# Altium PCB PCB1.PcbDoc
Units mil, origin at the board's own origin, x right, y up, seen from the top; angles counter-clockwise.
Board outline 2380 x 3440 mil, 2 copper layers (Top Layer, Bottom Layer); 14 components, 43 nets, 141 pads, 58 vias.
Unrouted connection lines stored in the file: 2.
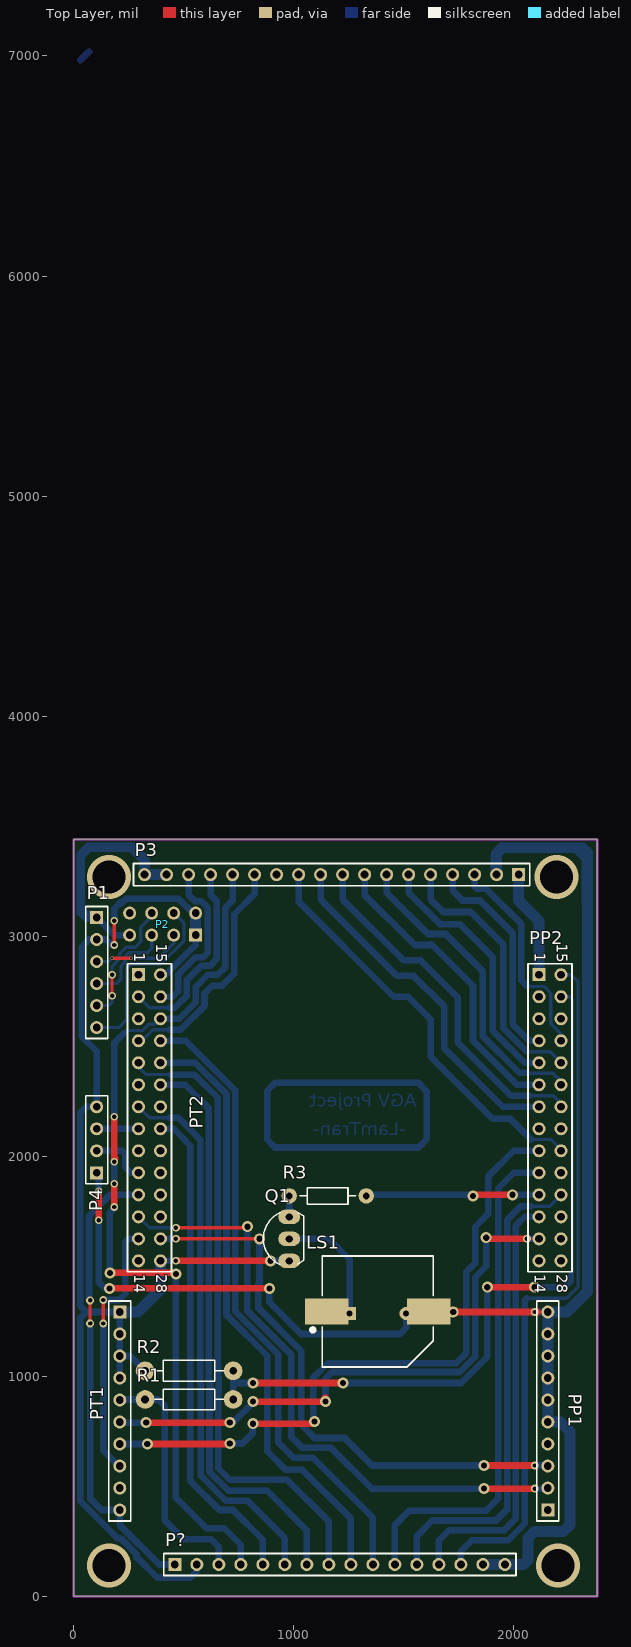
[diagram p0: Top Layer view]
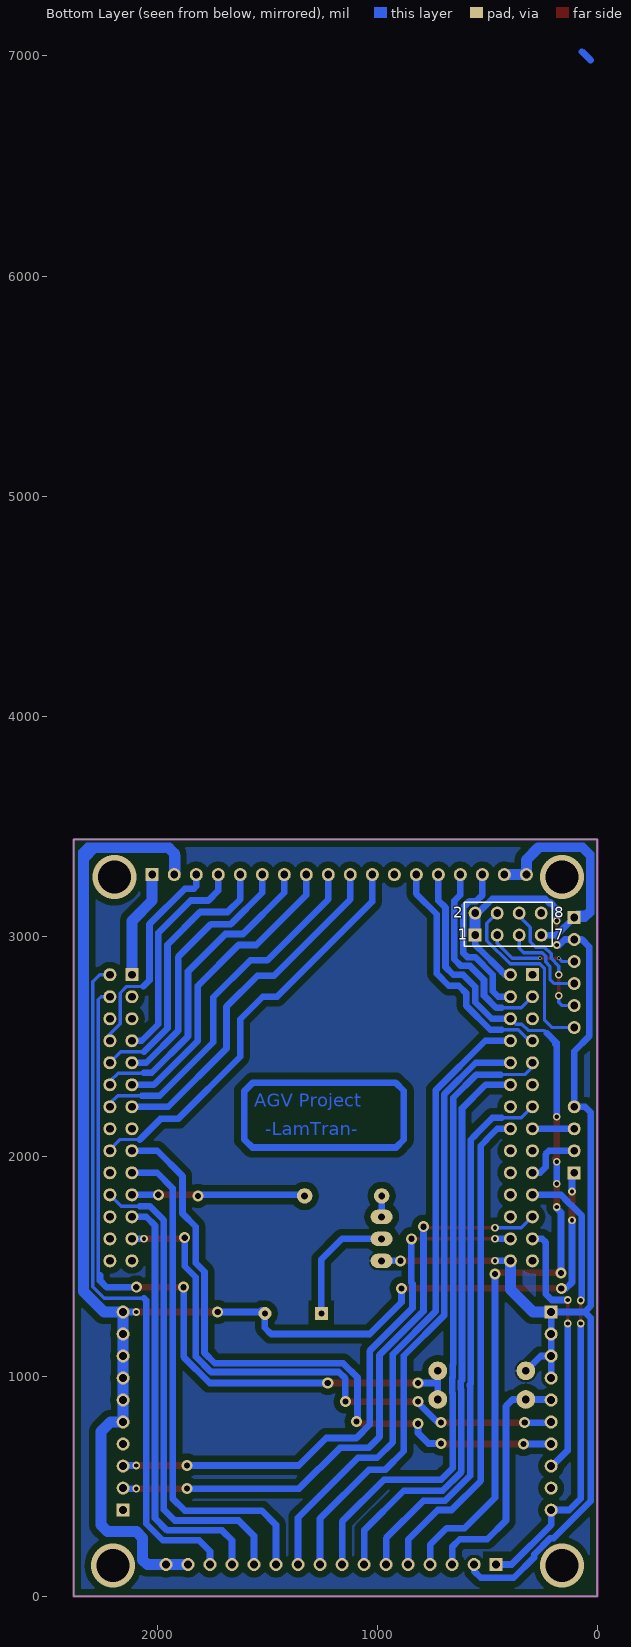
[diagram p1: Bottom Layer view, seen from below]

## Layer stack, top to bottom
Top Solder: solder mask 0.4, Solder Resist, Dk 3.5
Top Layer: signal copper 1.4
Dielectric 1: dielectric 12.6, FR-4, Dk 4.8
Bottom Layer: signal copper 1.4
Bottom Solder: solder mask 0.4, Solder Resist, Dk 3.5

## Board outline
0,0 0,3440 2380,3440 2380,0

## Design rules (kind name [scope] priority, off if disabled: settings)
Clearance [All] p1: gap=30 ignorepadtopadclearanceinfootprint=FALSE
PolygonConnect [All] p1: connectstyle=Relief reliefconductorwidth=10 reliefentries=4 polygonreliefangle="90 Angle" airgapwidth=10
RoutingVias [All] p1: holewidth=15 width=20 viastyle="Through Hole" minholewidth=10 minwidth=15 maxholewidth=20 maxwidth=30
SolderMaskExpansion [All] p1: expansion=4
UnRoutedNet [All] p1: checkbadconnections=TRUE
Width [All] p1: maxlimit=50 minlimit=15 preferedwidth=30
29 further rules are at their usual default settings.

## Components (designator, comment, footprint, x,y, rotation, side; value= is the part's Value field where it differs from the comment)
LS1 "Buzzer" ABSM-1574 1150,1295 r0 top
P1 "Header 6" HDR1X6 105,3085 r270 top
P2 "Header 4X2" HDR2X4 555,3005 r180 top
P3 "Header 18" HDR1X18 2022.5,3280 r180 top
P4 "Header 4" HDR1X4 105,1925 r90 top
P? "Header 16" HDR1X16 460,145 r0 top
PP1 "Header 10" HDR1X10 2155,392.5 r90 top
PP2 "Header 14X2A" HDR2X14_CEN 2115,2825 r270 top
PT1 "Header 10" HDR1X10 210,1292.5 r270 top
PT2 "Header 14X2A" HDR2X14_CEN 295,2825 r270 top
Q1 "C1815" QTO-92 980,1625 r90 top
R1 "10k" RES-1/4W 510,900 r180 top
R2 "10k" RES-1/4W 510,1030 r180 top
R3 "1k" R1/4W 1330,1820 r180 top value="R1/4W - 1K"

## Footprints (in the part's own frame and the unit in brackets; to place one, negate y for a bottom-side part, rotate by r counter-clockwise, add the part's x,y. Pads: shape width x height; smd on the part's side, far side on the other; paste and mask are expansions set on the pad)
ABSM-1574 [mm] "Magnetic Transducer Buzzer"
  rect 5x3 smd: 1(0,0) 2(11.8,0)
  rect 1.5x1.5 hole 0.7: 1A(2.65,-0.24)
  round 1.5 hole 0.7: 2A(9.15,-0.24)
  silkscreen extent -1.83,-6.4 12.3,6.4
HDR1X4 [mm] "Connector; Header; 4 Position"
  rect 1.5x1.5 hole 0.9: 1(0,0)
  round 1.5 hole 0.9: 2(2.54,0) 3(5.08,0) 4(7.62,0)
  silkscreen extent -1.27,-1.27 8.89,1.27
HDR1X6 [mm] "Connector; Header; 6 Position"
  rect 1.5x1.5 hole 0.9: 1(0,0)
  round 1.5 hole 0.9: 2(2.54,0) 3(5.08,0) 4(7.62,0) 5(10.16,0) 6(12.7,0)
  silkscreen extent -1.27,-1.27 13.97,1.27
HDR1X10 [mm] "Connector; Header; 10 Position"
  rect 1.5x1.5 hole 0.9: 1(0,0)
  round 1.5 hole 0.9: 2(2.54,0) 3(5.08,0) 4(7.62,0) 5(10.16,0) 6(12.7,0) 7(15.24,0) 8(17.78,0) 9(20.32,0) 10(22.86,0)
  silkscreen extent -1.27,-1.27 24.13,1.27
HDR1X16 [mm] "Connector; Header; 16 Position"
  rect 1.5x1.5 hole 0.9: 1(0,0)
  round 1.5 hole 0.9: 2(2.54,0) 3(5.08,0) 4(7.62,0) 5(10.16,0) 6(12.7,0) 7(15.24,0) 8(17.78,0) 9(20.32,0) 10(22.86,0) 11(25.4,0) 12(27.94,0) 13(30.48,0) 14(33.02,0) 15(35.56,0) 16(38.1,0)
  silkscreen extent -1.27,-1.27 39.37,1.27
HDR1X18 [mm] "Connector; Header; 18 Position"
  rect 1.5x1.5 hole 0.9: 1(0,0)
  round 1.5 hole 0.9: 2(2.54,0) 3(5.08,0) 4(7.62,0) 5(10.16,0) 6(12.7,0) 7(15.24,0) 8(17.78,0) 9(20.32,0) 10(22.86,0) 11(25.4,0) 12(27.94,0) 13(30.48,0) 14(33.02,0) 15(35.56,0) 16(38.1,0) 17(40.64,0) 18(43.18,0)
  silkscreen extent -1.27,-1.27 44.45,1.27
HDR2X4 [mm] "Connector; Header; 4x2 Position"
  rect 1.5x1.5 hole 0.9: 1(0,0)
  round 1.5 hole 0.9: 2(0,-2.54) 3(2.54,0) 4(2.54,-2.54) 5(5.08,0) 6(5.08,-2.54) 7(7.62,0) 8(7.62,-2.54)
HDR2X14_CEN [mm] "Connector; Header; 14x2 Position"
  rect 1.5x1.5 hole 0.9: 1(0,0)
  round 1.5 hole 0.9: 2(2.54,0) 3(5.08,0) 4(7.62,0) 5(10.16,0) 6(12.7,0) 7(15.24,0) 8(17.78,0) 9(20.32,0) 10(22.86,0) 11(25.4,0) 12(27.94,0) 13(30.48,0) 14(33.02,0) 15(0,2.54) 16(2.54,2.54) 17(5.08,2.54) 18(7.62,2.54) 19(10.16,2.54) 20(12.7,2.54) 21(15.24,2.54) 22(17.78,2.54) 23(20.32,2.54) 24(22.86,2.54) 25(25.4,2.54) 26(27.94,2.54) 27(30.48,2.54) 28(33.02,2.54)
  silkscreen extent -1.27,-1.27 34.29,3.81
QTO-92 [mil] "TO-92"
  oval 66x100 hole 32: 1(-100,0) 2(0,0) 3(100,0)
  silkscreen extent -117,-65 120,118, body extent -109,-66 109,95, height 245
R1/4W [mil] "R 1/4W, 2 Pin, 350mil"
  round 70 hole 31: 1(0,0) 2(350,0)
  silkscreen extent 48,-38 302,38, body extent -40,-47 386,47, height 111
RES-1/4W [mil]
  round 85 hole 35: 1(-215,5) 2(185,5)
  silkscreen extent -173,-42 141,52, body extent -227,-42 197,52, height 95

## Part data
LS1: "Magnetic Transducer Buzzer", ComponentLink1Description="Manufacturer Link", ComponentLink1URL=http://www.megastar.com/linecard/buzzmode/index.php, DatasheetVersion=17-Dec-2003, LatestRevisionDate=17-Dec-2003, LatestRevisionNote="Schematic revised, PCB Footprint replaced.", PackageDescription="Magnetic Transducer Buzzer", PackageReference=ABSM-1574, Published=24-Mar-1999, Publisher="Altium Limited"
P1: "Header, 6-Pin", LatestRevisionDate=17-Jul-2002, LatestRevisionNote="Re-released for DXP Platform.", Publisher="Altium Limited"
P2: "Header, 4-Pin, Dual row", LatestRevisionDate=17-Jul-2002, LatestRevisionNote="Re-released for DXP Platform.", Publisher="Altium Limited"
P3: "Header, 18-Pin", LatestRevisionDate=17-Jul-2002, LatestRevisionNote="Re-released for DXP Platform.", Publisher="Altium Limited"
P4: "Header, 4-Pin", LatestRevisionDate=17-Jul-2002, LatestRevisionNote="Re-released for DXP Platform.", Publisher="Altium Limited"
P?: "Header, 16-Pin", LatestRevisionDate=17-Jul-2002, LatestRevisionNote="Re-released for DXP Platform.", Publisher="Altium Limited"
PP1 PT1: "Header, 10-Pin", LatestRevisionDate=17-Jul-2002, LatestRevisionNote="Re-released for DXP Platform.", Publisher="Altium Limited"
PP2 PT2: "Header, 14-Pin, Dual row", LatestRevisionDate=17-Jul-2002, LatestRevisionNote="Re-released for DXP Platform.", Publisher="Altium Limited"
Q1: "NPN 600mW, ECB", =C2383
R1 R2: library part Res, "Res", Manufacturer="Generic Components", Class=Passive, Published=08/06/2000, Publisher="Altium Hobart Technology Centre", SubClass=R
R3: library part R1/4W, "Resistor 1/4W"

## Via types
v1: diameter 50, hole 28, Top Layer to Bottom Layer, 25 vias
v2: diameter 35, hole 20, Top Layer to Bottom Layer, 21 vias
v3: diameter 15, hole 10, Top Layer to Bottom Layer, 8 vias
v4: diameter 200, hole 150, Top Layer to Bottom Layer, 4 vias

## Nets (pads, with @x,y where several pads share a name; then routed paths per layer and width w, separated by ;. In a path a pad name is that pad's centre, name@x,y a point inside that pad or via, vN(x,y) a via of type N, cw(c..) or ccw(c..) an arc to the next point about the centre after c; other vN are vias at no path point)
GND: P1.2 P2.1 P2.2 P3.1 P4.4 P?.2 PP2.1 PT1.1 PT1.2 PT1.3 PT1.4 PT2.15 PT2.28 Q1.1 R2.2 | length 6507.9
  Top Layer w15: v2(185,2960) v2(185,3070)
  Top Layer w30: v2(465,1525) v1@885,1525
  Bottom Layer w15: v2(185,3070) v2@185,3075
  Bottom Layer w30: v2(185,2960) 173.43,2960 148.43,2985 P1.2 70,2985 37.5,2952.5 37.5,2545 105,2477.5 P4.4 56,2225 30,2199 30,1320 57.5,1292.5 ; v2@185,3075 185,3125 215,3155 ; PT1.4 PT1.3 ; 218.89,3151.11 237.58,3169.81 477.69,3169.81 542.5,3105 P2.2 ; R2.2 257.5,1092.5 PT1.3 ; PT2.28 v2(465,1525) ; PT2.15@395,2836.57 PT2.15 420,2825 435,2840 435,2841.57 538.43,2945 540,2945 555,2960 P2.1 ; P?.2 560,115 530,85 380,85 286,179 286,191.78 212.78,265 198.43,265 30,433.43 30,1265 57.5,1292.5 ; v1@885,1525 v1(895,1525) Q1.1 ; 57.5,1292.5 PT1.1 PT1.2 PT1.3
  Bottom Layer w50: PT1.1 292.5,1292.5 395,1395 PT2.28 ; P2.1 P2.2 ; P3.1 2022.5,3162.5 2115,3070 PP2.1
NetLS1_1: LS1.1 LS1.1A Q1.2 | length 559.4
  Bottom Layer w30: Q1.2 1160,1625 1255,1530 LS1.1A@1255,1285
NetLS1_2: LS1.2 LS1.2A P3.2 P4.1 P?.15 P?.16 PP1.5 PP1.6 PP1.7 PP1.8 PP1.9 PP1.10 | length 7059
  Top Layer w30: v3(115,1710) v3(115,1840) ; v1(163.75,1400) v1(890,1400) ; v1(1725,1292.5) 1727.5,1292.5 1735,1300 1742.5,1292.5 v2@2110,1292.5
  Bottom Layer w30: P4.1 115,1915 v3(115,1840) ; v3(115,1710) 115,1426.57 141.57,1400 v1(163.75,1400) ; v1(890,1400) 890,1336.57 1034.07,1192.5 1482.5,1192.5 1510.91,1220.91 1510.91,1285 1525.91,1300 1533.41,1292.5 v1(1725,1292.5) ; 1947.5,3400 2265,3400 2270,3405 2335,3340 2335,3140 ; v2@2110,1292.5 PP1.10
  Bottom Layer w50: P?.15 P?.16 2045,145 2066,166 2066,266 2095,295 2225,295 2255,325 2255,750 2212.5,792.5 PP1.5 PP1.6 PP1.7 PP1.8 PP1.9 PP1.10 2242.5,1292.5 2335,1385 2335,3140 ; P3.2 1922.5,3375 1947.5,3400
  other v2: 2095,1292.5 115,1710 115,1840
NetP1_1: P1.1 P2.7 P3.17 P3.18 PT2.1 | length 1008.9
  Bottom Layer w30: P2.7 185,3005 P1.1 55,3085 36,3104 36,3361 75,3400 270,3400
  Bottom Layer w50: 270,3400 322.5,3347.5 P3.18 P3.17
NetP1_3: P1.3 P2.3 | length 420.9
  Top Layer w15: v3(175,2900) v3(260.84,2900)
  Bottom Layer w15: P1.3 159.64,2885 174.64,2900 v3(175,2900) ; v3(260.84,2900) 386.21,2900 455,2968.79 P2.3
NetP1_4: P1.4 P2.5 | length 425.8
  Bottom Layer w15: P1.4 195,2785 215.13,2805.13 215.13,2864.29 235,2884.16 235,2909.51 250.49,2925 335,2925 355,2945 P2.5
NetP1_5: P1.5 P2.6 | length 585.3
  Top Layer w15: v2(175,2730) 167.5,2737.5 175,2745 v2(175,2825)
  Bottom Layer w15: P1.5 160,2685 175,2700 v2(175,2730) ; v2(175,2825) 175,2864.64 210,2899.64 210,2919.87 240.13,2950 280,2950 305,2975 305,3040 355,3090 P2.6
NetP1_6: P1.6 P2.4 | length 841.8
  Bottom Layer w15: P1.6 205,2585 240.13,2620.13 240.13,2853.93 261.2,2875 396.57,2875 502.03,2980.46 502.03,3057.97 P2.4
NetP3_3: P3.3 PP2.18 | length 984.9
  Bottom Layer w15: 2062.97,2772.03 2137.97,2772.03 2167.97,2742.03 2167.97,2602.03 2215,2555 PP2.18
  Bottom Layer w30: P3.3 1822.5,3227.5 1835,3215 1875,3215 2035,3055 2035,2800 2062.97,2772.03
NetP3_4: P3.4 PP2.4 | length 990.8
  Bottom Layer w30: P3.4 1722.5,3207.5 1767.5,3162.5 1847.5,3162.5 1995,3015 1995,2600 2070,2525 PP2.4
NetP3_5: P3.5 PP2.19 | length 1235.2
  Bottom Layer w15: 2060,2475 2165,2475 PP2.19
  Bottom Layer w30: P3.5 1622.5,3167.5 1680,3110 1805,3110 1953.33,2961.67 1953.33,2581.67 2060,2475
NetP3_6: P3.6 PP2.5 | length 1191.2
  Bottom Layer w30: P3.6 1522.5,3197.5 1665,3055 1755,3055 1905,2905 1905,2570 2050,2425 PP2.5
NetP3_7: P3.7 PP2.20 | length 1418
  Bottom Layer w15: 2060,2380 2062.03,2377.97 2177.03,2377.97 2215,2340 PP2.20
  Bottom Layer w30: P3.7 1422.5,3197.5 1610,3010 1690,3010 1860,2840 1860,2545 2025,2380 2060,2380
NetP3_8: P3.8 PP2.6 | length 1388.7
  Bottom Layer w30: P3.8 1322.5,3187.5 1550,2960 1630,2960 1815,2775 1815,2525 2015,2325 PP2.6
NetP3_9: P3.9 PP2.21 | length 1623.8
  Bottom Layer w15: 2070,2275 2180,2275 2215,2240 PP2.21
  Bottom Layer w30: P3.9 1222.5,3167.5 1500,2890 1577.5,2890 1745,2722.5 1745,2518.33 1988.33,2275 2070,2275
NetP3_10: P3.10 PP2.7 | length 1606.7
  Bottom Layer w30: P3.10 1122.5,3167.5 1470,2820 1545,2820 1685,2680 1685,2490 1950,2225 PP2.7
NetP3_11: P3.11 PP2.23 | length 1886.6
  Bottom Layer w15: 2078.56,2076.44 2168.56,2076.44 2215,2030 PP2.23
  Bottom Layer w30: P3.11 1022.5,3157.5 1455,2725 1520,2725 1622.5,2622.5 1622.5,2452.5 1905,2170 1985,2170 2078.56,2076.44
NetP3_13: P3.13 PT2.4 | length 1082.8
  Bottom Layer w15: PT2.4 310,2525 360,2575 435,2575
  Bottom Layer w30: 435,2575 486.57,2575 595,2683.43 595,2740 630,2775 675,2775 730,2830 730,3100 822.5,3192.5 P3.13
NetP3_14: P3.14 P?.4 PT2.17 | length 3975.8
  Top Layer w30: v1(165,1470) 460,1470 v1(465,1465) ; v3(185,1769.5) v3(185,1875) ; v2(185,1975) 185,1985 190,1990 185,1995 v2(185,2180)
  Bottom Layer w15: 230,2560 242.03,2572.03 314.48,2572.03 342.45,2600 370,2600 PT2.17
  Bottom Layer w30: v1(165,1470) 165,1744 185,1764 v3(185,1769.5) ; v3(185,1875) v2(185,1975) ; v2(185,2180) 185,2505 190,2510 185,2515 230,2560 ; PT2.17 480,2625 555,2700 555,2770 610,2825 655,2825 690,2860 690,3130 722.5,3162.5 P3.14 ; v1(465,1465) 465,448.72 603.72,310 685,310 760,235 P?.4
  other v2: 185,1769.5 185,1875
NetP3_15: P3.15 PT2.2 | length 905.2
  Bottom Layer w15: PT2.2 345,2675 435,2675
  Bottom Layer w30: 435,2675 460,2675 515,2730 515,2801.57 578.43,2865 620,2865 650,2895 650,3160 622.5,3187.5 P3.15
NetP3_16: P3.16 PT2.16 | length 750.6
  Bottom Layer w30: PT2.16 450,2725 475,2750 475,2825 555,2905 590,2905 610,2925 610,3130 580.47,3159.53 550.47,3159.53 522.5,3187.5 P3.16
NetP4_2: P4.2 PT2.10 | length 266.6
  Bottom Layer w30: P4.2 220,2025 235,2010 235,1950 260,1925 PT2.10
NetP4_3: P4.3 PT2.8 | length 190
  Bottom Layer w30: P4.3 PT2.8
NetP?_1: P?.1 PT1.10 PT2.11 | length 2102.5
  Top Layer w15: v2(75,1240) v2(75,1345)
  Bottom Layer w30: v2(75,1240) 75,445 127.5,392.5 PT1.10 210,325 209.34,325 389.34,145 P?.1 ; v2(75,1345) 70,1350 70,1730 120,1780 121.57,1780 145,1803.43 145,1805 165,1825 PT2.11
  other v3: 80,1245 80,1345
NetP?_3: P?.3 PT1.5 R1.2 | length 1113.2
  Bottom Layer w30: PT1.5 212.5,895 R1.2 385,895 415,865 415,345 500,260 625,260 660,225 P?.3
NetP?_5: P?.5 PT2.22 | length 2244.4
  Bottom Layer w30: PT2.22 455,2125 505,2075 505,2073.14 530,2048.14 530,525 662.5,392.5 725,392.5 860,257.5 P?.5
NetP?_6: P?.6 PT2.7 | length 2492.3
  Bottom Layer w15: PT2.7 345,2175 435,2175
  Bottom Layer w30: 435,2175 476.86,2175 555.81,2096.05 555.81,2094.19 575,2075 575,966.4 580,961.4 580,958.6 577.5,956.1 577.5,549.36 691.86,435 790,435 960,265 P?.6
NetP?_7: P?.7 PT2.20 | length 2626.9
  Bottom Layer w30: PT2.20 507.5,2325 615,2217.5 615,982.97 620,977.97 620,942.03 617.5,939.53 617.5,565.93 703.43,480 880,480 1060,300 P?.7
NetP?_8: P?.8 PT2.5 | length 2922
  Bottom Layer w15: PT2.5 295,2405 327.97,2372.03 427.97,2372.03 430,2370 440,2370
  Bottom Layer w30: 440,2370 550.81,2370 655,2265.81 655,1055.46 657.5,1052.96 657.5,997.04 660,994.54 660,925.46 657.5,922.96 657.5,582.5 710,530 970,530 1160,340 P?.8
NetP?_9: P?.9 PT2.19 | length 2773.7
  Bottom Layer w30: PT2.19 552.38,2425 695,2282.38 695,1278.43 880,1093.43 880,660 965,575 1038.72,575 1260,353.72 P?.9
NetP?_10: P?.10 PT2.18 | length 2897.7
  Bottom Layer w30: PT2.18 508.95,2525 735,2298.95 735,1295 930,1100 930,700 1000,630 1087.5,630 1360,357.5 P?.10
NetP?_11: P?.11 PP2.10 | length 2323.7
  Bottom Layer w30: P?.11 1460,325 1525,390 1875,390 1930,445 1930,1855 2000,1925 PP2.10
NetP?_12: P?.12 PP2.25 | length 2197.3
  Bottom Layer w15: 2078.56,1773.56 2163.56,1773.56 PP2.25
  Bottom Layer w30: P?.12 1560,275 1630,345 1920,345 1970,395 1970,1710 2033.56,1773.56 2078.56,1773.56
NetP?_13: P?.13 PP2.12 | length 1953
  Bottom Layer w30: P?.13 1660,255 1705,300 1955,300 2010,355 2010,1685 2050,1725 PP2.12
NetP?_14: P?.14 PP2.15 | length 3161.1
  Bottom Layer w15: 2060,1355 2240,1355 2292.5,1407.5 2292.5,2792.5 2260,2825 PP2.15
  Bottom Layer w30: P?.14 1760,205 1810,255 1975,255 2050,330 2050,1345 2060,1355
NetPP1_2: PP1.2 PT2.12 | length 2806.1
  Top Layer w15: v2(465,1675) v1@780,1675
  Top Layer w30: v1(1865,490) v2(2095,490)
  Bottom Layer w15: PT2.12 345,1675 v2(465,1675)
  Bottom Layer w30: v1@780,1675 790,1665 790,1296.57 990,1096.57 990,725 1040,675 1170,675 1355,490 v1(1865,490) ; v2(2095,490) 2152.5,490 PP1.2
  other v1: 790,1680
NetPP1_3: PP1.3 PT2.27 | length 2590.3
  Top Layer w15: v2@454.19,1625 v1(845,1625)
  Top Layer w30: v1(1865,595) v2(2095,595) ; PP1.3@2147.5,600 PP1.3
  Bottom Layer w30: PT2.27 v2@454.19,1625 ; v1(845,1625) 845,1425.71 840,1420.71 840,1310 1035,1115 1035,780 1095,720 1231.57,720 1356.57,595 v1(1865,595) ; v2(2095,595) 2142.5,595 2147.5,590 2152.5,595 PP1.3
  other v2: 465,1625
NetPP2_9: PP2.9 PT1.7 | length 3018.1
  Top Layer w30: v1(335,692.5) 707.5,692.5 v1(710,695) ; v1(815,785) 1085,785 v1(1095,795)
  Bottom Layer w30: PT1.7 v1(335,692.5) ; v1(710,695) 767.5,695 815,742.5 v1(815,785) ; v1(1095,795) 1090,800 1090,995 1155,1060 1738.43,1060 1785,1106.57 1785,1475 1825,1515 1825,1680 1885,1740 1885,1910 2000,2025 PP2.9
NetPP2_11: PP2.11 R3.1 | length 789.1
  Top Layer w30: v1@1810,1825 v1(1995,1825)
  Bottom Layer w30: R3.1@1330,1835 1340,1825 v1@1810,1825 ; v1(1995,1825) PP2.11
  other v1: 1815,1820
NetPP2_13: PP2.13 PT1.6 | length 2634.2
  Top Layer w30: v1(330,790) v1(710,790) ; v1(815,885) 1126.57,885 1145,903.43 v1(1145,885) ; v1(1875,1630) 1880,1625 v2@2065,1625
  Bottom Layer w30: PT1.6 212.5,790 v1(330,790) ; v1(710,790) 725,790 v1@820,885 ; v1(815,885) v1@820,885 ; v1@822.5,887.5 v1@820,885 ; v1(1145,885) 1145,990 1175,1020 1755,1020 1825,1090 1825,1450 1875,1500 v1(1875,1630) ; v2@2075,1625 PP2.13
  other v2: 2060,1625
NetPP2_16: PP2.16 R1.1 R2.1 | length 3368.2
  Top Layer w30: v1(815,970) v1(1225,970) ; v1(1880,1405) v1@2085,1405
  Bottom Layer w15: PP2.16 2255,2725 2267.5,2712.5 2267.5,1460
  Bottom Layer w30: R1.1 725,970 ; R2.1 725,970 ; v1(815,970) 725,970 ; v1(1225,970) 1761.57,970 1880,1088.43 v1(1880,1405) ; v1(2095,1405) 2230,1405 2260,1435 2260,1460
NetPT1_8: PT1.8 PT2.13 | length 1200.9
  Top Layer w15: v2(135,1240) v2(135,1347.03)
  Bottom Layer w30: v2(135,1240) 135,663.14 205.64,592.5 PT1.8 ; v2(135,1347.03) 207.03,1347.03 235,1375 235,1610 250,1625 PT2.13
NetQ1_3: Q1.3 R3.2 | length 110
  Bottom Layer w30: Q1.3 R3.2@980,1835
pads on no net: P2.8 P3.12 PP1.1 PP1.4 PP2.2 PP2.3 PP2.8 PP2.14 PP2.17 PP2.22 PP2.24 PP2.26 PP2.27 PP2.28 PT1.9 PT2.3 PT2.6 PT2.9 PT2.14 PT2.21 PT2.23 PT2.24 PT2.25 PT2.26
copper on no net: | length 2007.3
  Bottom Layer w30: 31,6981 70,7020 ; 880,2075 880,2297.5 917.5,2335 1565,2335 1605,2295 1605,2160.01 1605,2077.5 1567.5,2040 915,2040 880,2075
  other v4: 161,140 2201,140 161,3270 2195,3270

## Polygon pours and split planes (outlines as drawn)
GND on Bottom Layer (solid, pour order 33): 2380,3440 0,3440 0,0 2380,0
no net on Bottom Layer "Bottom Layer-No Net" (solid, pour order 31): 0,7060
no net on Bottom Layer "Bottom Layer-No Net" (solid, pour order 0): 5,3440

## Keep-outs
Keep-Out Layer:
  the board outline again, w10

## Other copper
Bottom Layer:
  region: 450,3380
  region net NetP1_1: 265,3425 60,3425 15,3380 15,3100 50,3065 95,3065 95,3115 60,3115 50,3125 50,3365 70,3385 265,3385
  region net NetLS1_2: 1953.33,3425 1950,3425 1895,3370 1895,3285 1935,3285 1940,3290 1940,3402.5 1965.83,3402.5 1978.33,3415
  region net NetLS1_2: 1938.61,3425 2322.78,3425 2358.89,3388.89 2358.89,3140 2315,3140 2310,3145 2310,3352.78 2282.78,3380 1963.61,3380
  region net NetLS1_2: 1922.5,3357.5
  text "AGV Project" at 1560,2225 h60
  text "-LamTran-" at 1510,2095 h60

## Text inside footprints (layer, text, board x,y; h text height)
P2: Bottom Overlay "2" at 655,3085 h50; Bottom Overlay "1" at 635,2985 h50; Bottom Overlay "7" at 195,2985 h50; Bottom Overlay "8" at 195,3085 h50
PP2: Top Overlay "28" at 2195,1465 h50 r270; Top Overlay "14" at 2095,1465 h50 r270; Top Overlay "1" at 2095,2925 h50 r270; Top Overlay "15" at 2195,2965 h50 r270
PT2: Top Overlay "15" at 375,2965 h50 r270; Top Overlay "1" at 275,2925 h50 r270; Top Overlay "14" at 275,1465 h50 r270; Top Overlay "28" at 375,1465 h50 r270